# Altium PCB STLinkV2_1.PcbDoc (part 2 of 2)
Units mm, origin at the board's own origin, x right, y up, seen from the top; angles counter-clockwise.
Board outline 37 x 14 mm, 4 copper layers (Top Layer, GND, Layer 2, Bottom Layer), stack 1.587 mm thick; 49 components, 42 nets, 180 pads, 75 vias.
Unrouted connection lines stored in the file: 1.
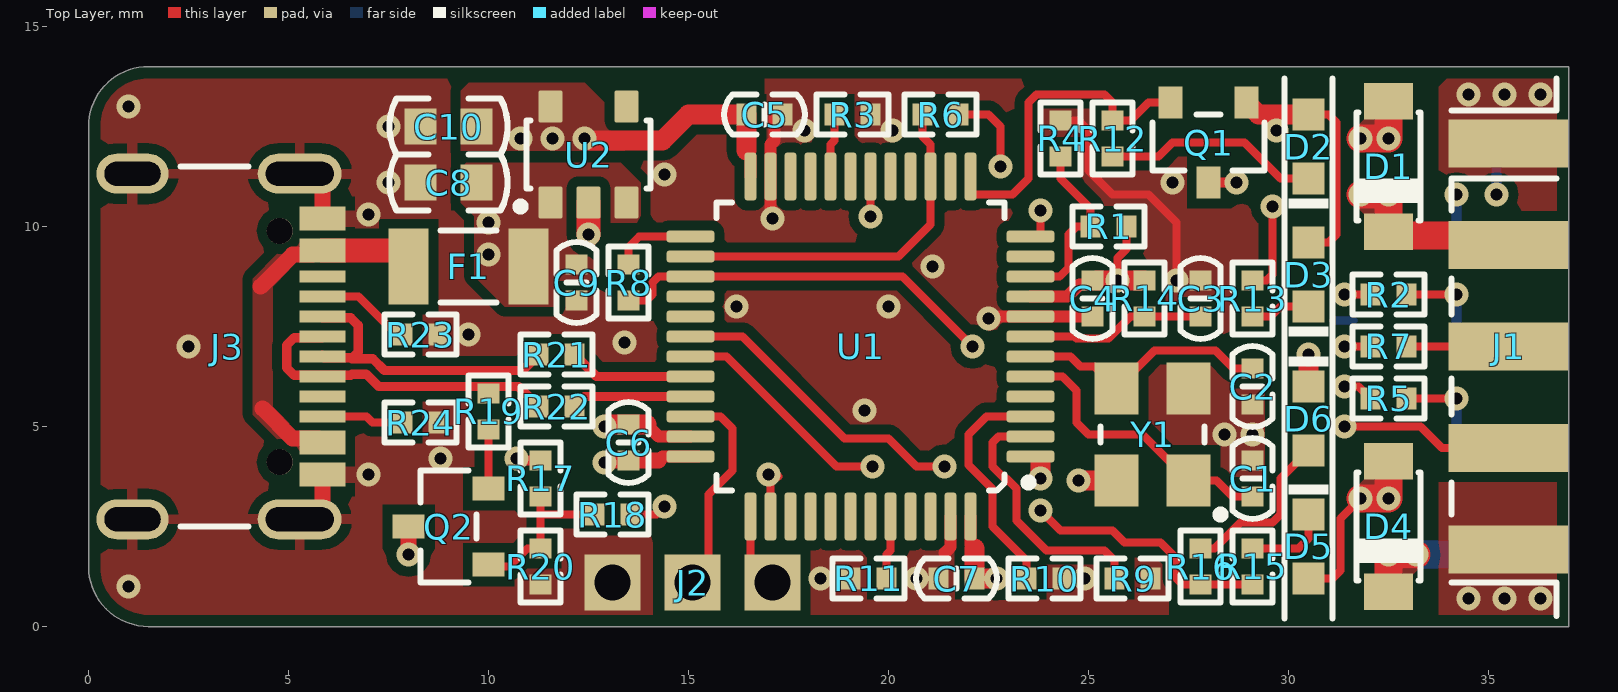
[diagram p0: Top Layer view]

## Part data (continued)
R8 R12 R13 R18: library part RES_AC0402FR-7W100RL, "Res Thick Film 0402 100 Ohm 1% 0.125W(1/8W) ±100ppm/C Pad SMD T/R Automotive AEC-Q200", Case/Package=0402, Manufacturer 1="Yageo Group", Manufacturer Part Number 1=AC0402FR-7W100RL, Max Operating Temperature=155°C, Min Operating Temperature=-55°C, Power Dissipation=125mW, Resistance=100?, Supplier Part Number 1=13-AC0402FR-7W100RLCT-ND, Temperature Coefficient=100ppm/°C, TOLERANCE=1%, Voltage Rating=50V, Working Voltage=75V, China RoHS=Non-Compliant, ComponentLink1Description=https://datasheet.octopart.com:443/AC0402FR-7W100RL-Yageo-datasheet-182189377.pdf?src-supplier=IHS, ComponentLink1URL=https://datasheet.octopart.com:443/AC0402FR-7W100RL-Yageo-datasheet-182189377.pdf?src-supplier=IHS, ComponentLink2Description=https://datasheet.octopart.com:443/AC0402FR-7W100RL-Yageo-datasheet-83209224.pdf?src-supplier=Upverter, ComponentLink2URL=https://datasheet.octopart.com:443/AC0402FR-7W100RL-Yageo-datasheet-83209224.pdf?src-supplier=Upverter, ComponentLink3Description=https://datasheet.octopart.com:443/AC0402FR-7W100RL-Yageo-datasheet-178509465.pdf?src-supplier=Newark, ComponentLink3URL=https://datasheet.octopart.com:443/AC0402FR-7W100RL-Yageo-datasheet-178509465.pdf?src-supplier=Newark, ComponentLink4Description=https://datasheet.octopart.com:443/AC0402FR-7W100RL-Yageo-datasheet-164768995.pdf?src-supplier=ODG+(Origin+Data+Global), ComponentLink4URL=https://datasheet.octopart.com:443/AC0402FR-7W100RL-Yageo-datasheet-164768995.pdf?src-supplier=ODG+(Origin+Data+Global), ComponentLink5Description=https://datasheet.octopart.com:443/AC0402FR-7W100RL-Yageo-Group-datasheet-189830439.pdf?src-supplier=Future+Electronics, ComponentLink5URL=https://datasheet.octopart.com:443/AC0402FR-7W100RL-Yageo-Group-datasheet-189830439.pdf?src-supplier=Future+Electronics, ComponentLink6Description=https://datasheet.octopart.com:443/AC0402FR-7W100RL-Yageo-datasheet-166720450.pdf?src-supplier=Future+Electronics, ComponentLink6URL=https://datasheet.octopart.com:443/AC0402FR-7W100RL-Yageo-datasheet-166720450.pdf?src-supplier=Future+Electronics, ComponentLink7Description=https://datasheet.octopart.com:443/AC0402FR-7W100RL-Yageo-Group-datasheet-159083007.pdf?src-supplier=HQonline, ComponentLink7URL=https://datasheet.octopart.com:443/AC0402FR-7W100RL-Yageo-Group-datasheet-159083007.pdf?src-supplier=HQonline, ComponentLink8Description=https://datasheet.octopart.com/AC0402FR-7W100RL-Yageo-datasheet-12512238.pdf, ComponentLink8URL=https://datasheet.octopart.com/AC0402FR-7W100RL-Yageo-datasheet-12512238.pdf, ComponentLink9Description=http://sigma.octopart.com:80/conflict_mineral_statement/Yageo-company-3.pdf?src-supplier=Compliance+Statements, ComponentLink9URL=http://sigma.octopart.com:80/conflict_mineral_statement/Yageo-company-3.pdf?src-supplier=Compliance+Statements, ComponentLink10Description=http://sigma.octopart.com:80/rohs_statement/Yageo-company-2.pdf?src-supplier=Compliance+Statements, ComponentLink10URL=http://sigma.octopart.com:80/rohs_statement/Yageo-company-2.pdf?src-supplier=Compliance+Statements, Composition="Thick Film", Country of Origin="Mainland China, Taiwan", Export Control Classification Number (ECCN) Code=EAR99, Harmonized Tariff Schedule (HTS) Code=8533.21.00.30, Height=320µm, Introduction Date=2017-06-20, Lifecycle Status=Production, Mount="Surface Mount", Number of Terminals=2, Packaging="Tape & Reel", Power Rating=125mW, Pricing 1="1=0,1, 10=0,006, 25=0,0056, 50=0,0052, 100=0,005 (USD)", REACH SVHC=Yes, RoHS=Compliant, Stock 1=97922, Supplier 1=DigiKey, Width=500µm
R9 R10 R17: library part RES_AC0402FR-7W10KL, "Res Thick Film 0402 10K Ohm 1% 0.125W(1/8W) ±100ppm/C Pad SMD Automotive T/R", Case/Package=0402, Manufacturer 1="Yageo Group", Manufacturer Part Number 1=AC0402FR-7W10KL, Max Operating Temperature=155°C, Min Operating Temperature=-55°C, Power Dissipation=125mW, Resistance=10k?, Supplier Part Number 1=13-AC0402FR-7W10KLCT-ND, Temperature Coefficient=100ppm/°C, TOLERANCE=1%, Voltage Rating=50V, Working Voltage=75V, China RoHS=Non-Compliant, ComponentLink1Description=https://datasheet.octopart.com:443/AC0402FR-7W10KL-Yageo-datasheet-182189377.pdf?src-supplier=IHS, ComponentLink1URL=https://datasheet.octopart.com:443/AC0402FR-7W10KL-Yageo-datasheet-182189377.pdf?src-supplier=IHS, ComponentLink2Description=https://datasheet.octopart.com:443/AC0402FR-7W10KL-Yageo-datasheet-83209224.pdf?src-supplier=Upverter, ComponentLink2URL=https://datasheet.octopart.com:443/AC0402FR-7W10KL-Yageo-datasheet-83209224.pdf?src-supplier=Upverter, ComponentLink3Description=https://datasheet.octopart.com:443/AC0402FR-7W10KL-Yageo-datasheet-178509465.pdf?src-supplier=Farnell, ComponentLink3URL=https://datasheet.octopart.com:443/AC0402FR-7W10KL-Yageo-datasheet-178509465.pdf?src-supplier=Farnell, ComponentLink4Description=https://datasheet.octopart.com:443/AC0402FR-7W10KL-Yageo-datasheet-151884373.pdf?src-supplier=Future+Electronics, ComponentLink4URL=https://datasheet.octopart.com:443/AC0402FR-7W10KL-Yageo-datasheet-151884373.pdf?src-supplier=Future+Electronics, ComponentLink5Description=https://datasheet.octopart.com:443/AC0402FR-7W10KL-Yageo-Group-datasheet-189830439.pdf?src-supplier=Future+Electronics, ComponentLink5URL=https://datasheet.octopart.com:443/AC0402FR-7W10KL-Yageo-Group-datasheet-189830439.pdf?src-supplier=Future+Electronics, ComponentLink6Description=https://datasheet.octopart.com:443/AC0402FR-7W10KL-Yageo-datasheet-166720450.pdf?src-supplier=Future+Electronics, ComponentLink6URL=https://datasheet.octopart.com:443/AC0402FR-7W10KL-Yageo-datasheet-166720450.pdf?src-supplier=Future+Electronics, ComponentLink7Description=https://datasheet.octopart.com:443/AC0402FR-7W10KL-Yageo-Group-datasheet-164768995.pdf?src-supplier=ODG+(Origin+Data+Global), ComponentLink7URL=https://datasheet.octopart.com:443/AC0402FR-7W10KL-Yageo-Group-datasheet-164768995.pdf?src-supplier=ODG+(Origin+Data+Global), ComponentLink8Description=https://datasheet.octopart.com:443/AC0402FR-7W10KL-Yageo-Group-datasheet-159083007.pdf?src-supplier=HQonline, ComponentLink8URL=https://datasheet.octopart.com:443/AC0402FR-7W10KL-Yageo-Group-datasheet-159083007.pdf?src-supplier=HQonline, ComponentLink9Description=https://datasheet.octopart.com/AC0402FR-7W10KL-Yageo-datasheet-12512238.pdf, ComponentLink9URL=https://datasheet.octopart.com/AC0402FR-7W10KL-Yageo-datasheet-12512238.pdf, ComponentLink10Description=http://sigma.octopart.com:80/conflict_mineral_statement/Yageo-company-3.pdf?src-supplier=Compliance+Statements, ComponentLink10URL=http://sigma.octopart.com:80/conflict_mineral_statement/Yageo-company-3.pdf?src-supplier=Compliance+Statements, ComponentLink11Description=http://sigma.octopart.com:80/rohs_statement/Yageo-company-2.pdf?src-supplier=Compliance+Statements, ComponentLink11URL=http://sigma.octopart.com:80/rohs_statement/Yageo-company-2.pdf?src-supplier=Compliance+Statements, Composition="Thick Film", Height=320µm, Lifecycle Status=Production, Mount="Surface Mount", Number of Terminals=2, Packaging="Tape & Reel", Power Rating=125mW, Pricing 1="1=0,1, 10=0,012, 25=0,0096, 50=0,0072, 100=0,0051, 250=0,005 (USD)", REACH SVHC=Yes, RoHS=Compliant, Stock 1=252005, Supplier 1=DigiKey, Width=500µm
R15 R16: library part RES_AC0402FR-7W1KL, "Res Thick Film 0402 1K Ohm 1% 0.125W(1/8W) ±100ppm/C Pad SMD Automotive T/R", Case/Package=0402, Manufacturer 1="Yageo Group", Manufacturer Part Number 1=AC0402FR-7W1KL, Max Operating Temperature=155°C, Min Operating Temperature=-55°C, Power Dissipation=125mW, Resistance=1k?, Supplier Part Number 1=13-AC0402FR-7W1KLCT-ND, Temperature Coefficient=100ppm/°C, TOLERANCE=1%, Voltage Rating=50V, Working Voltage=75V, China RoHS=Non-Compliant, ComponentLink1Description=https://datasheet.octopart.com:443/AC0402FR-7W1KL-Yageo-datasheet-182189377.pdf?src-supplier=IHS, ComponentLink1URL=https://datasheet.octopart.com:443/AC0402FR-7W1KL-Yageo-datasheet-182189377.pdf?src-supplier=IHS, ComponentLink2Description=https://datasheet.octopart.com:443/AC0402FR-7W1KL-Yageo-datasheet-83209224.pdf?src-supplier=Upverter, ComponentLink2URL=https://datasheet.octopart.com:443/AC0402FR-7W1KL-Yageo-datasheet-83209224.pdf?src-supplier=Upverter, ComponentLink3Description=https://datasheet.octopart.com:443/AC0402FR-7W1KL-Yageo-datasheet-178509465.pdf?src-supplier=Farnell, ComponentLink3URL=https://datasheet.octopart.com:443/AC0402FR-7W1KL-Yageo-datasheet-178509465.pdf?src-supplier=Farnell, ComponentLink4Description=https://datasheet.octopart.com:443/AC0402FR-7W1KL-Yageo-datasheet-166720450.pdf?src-supplier=Future+Electronics, ComponentLink4URL=https://datasheet.octopart.com:443/AC0402FR-7W1KL-Yageo-datasheet-166720450.pdf?src-supplier=Future+Electronics, ComponentLink5Description=https://datasheet.octopart.com:443/AC0402FR-7W1KL-Yageo-datasheet-151884373.pdf?src-supplier=Future+Electronics, ComponentLink5URL=https://datasheet.octopart.com:443/AC0402FR-7W1KL-Yageo-datasheet-151884373.pdf?src-supplier=Future+Electronics, ComponentLink6Description=https://datasheet.octopart.com:443/AC0402FR-7W1KL-Yageo-datasheet-137699919.pdf?src-supplier=Future+Electronics, ComponentLink6URL=https://datasheet.octopart.com:443/AC0402FR-7W1KL-Yageo-datasheet-137699919.pdf?src-supplier=Future+Electronics, ComponentLink7Description=https://datasheet.octopart.com:443/AC0402FR-7W1KL-Yageo-Group-datasheet-164768995.pdf?src-supplier=ODG+(Origin+Data+Global), ComponentLink7URL=https://datasheet.octopart.com:443/AC0402FR-7W1KL-Yageo-Group-datasheet-164768995.pdf?src-supplier=ODG+(Origin+Data+Global), ComponentLink8Description=https://datasheet.octopart.com:443/AC0402FR-7W1KL-Yageo-Group-datasheet-159083007.pdf?src-supplier=HQonline, ComponentLink8URL=https://datasheet.octopart.com:443/AC0402FR-7W1KL-Yageo-Group-datasheet-159083007.pdf?src-supplier=HQonline, ComponentLink9Description=https://datasheet.octopart.com/AC0402FR-7W1KL-Yageo-datasheet-12512238.pdf, ComponentLink9URL=https://datasheet.octopart.com/AC0402FR-7W1KL-Yageo-datasheet-12512238.pdf, ComponentLink10Description=http://sigma.octopart.com:80/conflict_mineral_statement/Yageo-company-3.pdf?src-supplier=Compliance+Statements, ComponentLink10URL=http://sigma.octopart.com:80/conflict_mineral_statement/Yageo-company-3.pdf?src-supplier=Compliance+Statements, ComponentLink11Description=http://sigma.octopart.com:80/rohs_statement/Yageo-company-2.pdf?src-supplier=Compliance+Statements, ComponentLink11URL=http://sigma.octopart.com:80/rohs_statement/Yageo-company-2.pdf?src-supplier=Compliance+Statements, Composition="Thick Film", Country of Origin="Mainland China, Taiwan", Export Control Classification Number (ECCN) Code=EAR99, Harmonized Tariff Schedule (HTS) Code=8533.21.00.30, Height=320µm, Introduction Date=2017-06-20, Lifecycle Status=Production, Mount="Surface Mount", Number of Terminals=2, Packaging="Tape & Reel", Power Rating=125mW, Pricing 1="1=0,1, 10=0,009, 25=0,0072, 50=0,0052, 100=0,005 (USD)", REACH SVHC=Yes, RoHS=Compliant, Stock 1=24249, Supplier 1=DigiKey, Width=500µm
R19: library part RES_AC0402FR-7W1K5L, "Fixed Resistor, Metal Glaze/thick Film, 0.125W, 1500ohm, 75V, 1% +/-Tol, 100ppm/Cel, Surface Mount, 0402", Case/Package=0402, Manufacturer 1="Yageo Group", Manufacturer Part Number 1=AC0402FR-7W1K5L, Max Operating Temperature=155°C, Min Operating Temperature=-55°C, Power Dissipation=125mW, Resistance=1.5k?, Supplier Part Number 1=13-AC0402FR-7W1K5LCT-ND, Temperature Coefficient=100ppm/°C, TOLERANCE=1%, Voltage Rating=50V, Working Voltage=75V, China RoHS=Non-Compliant, ComponentLink1Description=https://datasheet.octopart.com:443/AC0402FR-7W1K5L-Yageo-datasheet-182189377.pdf?src-supplier=IHS, ComponentLink1URL=https://datasheet.octopart.com:443/AC0402FR-7W1K5L-Yageo-datasheet-182189377.pdf?src-supplier=IHS, ComponentLink2Description=https://datasheet.octopart.com:443/AC0402FR-7W1K5L-Yageo-datasheet-83209224.pdf?src-supplier=Upverter, ComponentLink2URL=https://datasheet.octopart.com:443/AC0402FR-7W1K5L-Yageo-datasheet-83209224.pdf?src-supplier=Upverter, ComponentLink3Description=https://datasheet.octopart.com:443/AC0402FR-7W1K5L-Yageo-datasheet-178509465.pdf?src-supplier=Farnell, ComponentLink3URL=https://datasheet.octopart.com:443/AC0402FR-7W1K5L-Yageo-datasheet-178509465.pdf?src-supplier=Farnell, ComponentLink4Description=https://datasheet.octopart.com:443/AC0402FR-7W1K5L-Yageo-datasheet-166720450.pdf?src-supplier=Future+Electronics, ComponentLink4URL=https://datasheet.octopart.com:443/AC0402FR-7W1K5L-Yageo-datasheet-166720450.pdf?src-supplier=Future+Electronics, ComponentLink5Description=https://datasheet.octopart.com:443/AC0402FR-7W1K5L-Yageo-datasheet-151884373.pdf?src-supplier=Future+Electronics, ComponentLink5URL=https://datasheet.octopart.com:443/AC0402FR-7W1K5L-Yageo-datasheet-151884373.pdf?src-supplier=Future+Electronics, ComponentLink6Description=https://datasheet.octopart.com/AC0402FR-7W1K5L-Yageo-datasheet-12512238.pdf, ComponentLink6URL=https://datasheet.octopart.com/AC0402FR-7W1K5L-Yageo-datasheet-12512238.pdf, ComponentLink7Description=http://sigma.octopart.com:80/conflict_mineral_statement/Yageo-company-3.pdf?src-supplier=Compliance+Statements, ComponentLink7URL=http://sigma.octopart.com:80/conflict_mineral_statement/Yageo-company-3.pdf?src-supplier=Compliance+Statements, ComponentLink8Description=http://sigma.octopart.com:80/rohs_statement/Yageo-company-2.pdf?src-supplier=Compliance+Statements, ComponentLink8URL=http://sigma.octopart.com:80/rohs_statement/Yageo-company-2.pdf?src-supplier=Compliance+Statements, Composition="Thick Film", Country of Origin="Mainland China, Taiwan", Export Control Classification Number (ECCN) Code=EAR99, Harmonized Tariff Schedule (HTS) Code=8533.21.00.30, Height=320µm, Introduction Date=2017-06-20, Lifecycle Status=Production, Mount="Surface Mount", Number of Terminals=2, Packaging="Tape & Reel", Power Rating=125mW, Pricing 1="1=0,1, 10=0,006, 25=0,0056, 50=0,0052, 100=0,005 (USD)", REACH SVHC=Yes, RoHS=Compliant, Stock 1=7370, Supplier 1=DigiKey, Width=500µm
R20: library part RES_AC0402FR-7W36KL, "Chip Resistor Automotive Grade Thick Film 0402 36kOhm 1% Paper T/R", Case/Package=0402, Manufacturer 1="Yageo Group", Manufacturer Part Number 1=AC0402FR-7W36KL, Max Operating Temperature=155°C, Min Operating Temperature=-55°C, Power Dissipation=125mW, Resistance=36k?, Supplier Part Number 1=13-AC0402FR-7W36KLCT-ND, Temperature Coefficient=100ppm/°C, TOLERANCE=1%, Voltage Rating=50V, Working Voltage=75V, China RoHS=Non-Compliant, ComponentLink1Description=https://datasheet.octopart.com:443/AC0402FR-7W36KL-Yageo-datasheet-182189377.pdf?src-supplier=IHS, ComponentLink1URL=https://datasheet.octopart.com:443/AC0402FR-7W36KL-Yageo-datasheet-182189377.pdf?src-supplier=IHS, ComponentLink2Description=https://datasheet.octopart.com:443/AC0402FR-7W36KL-Yageo-datasheet-83209224.pdf?src-supplier=Upverter, ComponentLink2URL=https://datasheet.octopart.com:443/AC0402FR-7W36KL-Yageo-datasheet-83209224.pdf?src-supplier=Upverter, ComponentLink3Description=https://datasheet.octopart.com:443/AC0402FR-7W36KL-Yageo-datasheet-178509465.pdf?src-supplier=Farnell, ComponentLink3URL=https://datasheet.octopart.com:443/AC0402FR-7W36KL-Yageo-datasheet-178509465.pdf?src-supplier=Farnell, ComponentLink4Description=https://datasheet.octopart.com:443/AC0402FR-7W36KL-Yageo-datasheet-166720450.pdf?src-supplier=Future+Electronics, ComponentLink4URL=https://datasheet.octopart.com:443/AC0402FR-7W36KL-Yageo-datasheet-166720450.pdf?src-supplier=Future+Electronics, ComponentLink5Description=https://datasheet.octopart.com:443/AC0402FR-7W36KL-Yageo-datasheet-151884373.pdf?src-supplier=Future+Electronics, ComponentLink5URL=https://datasheet.octopart.com:443/AC0402FR-7W36KL-Yageo-datasheet-151884373.pdf?src-supplier=Future+Electronics, ComponentLink6Description=https://datasheet.octopart.com/AC0402FR-7W36KL-Yageo-datasheet-12512238.pdf, ComponentLink6URL=https://datasheet.octopart.com/AC0402FR-7W36KL-Yageo-datasheet-12512238.pdf, ComponentLink7Description=http://sigma.octopart.com:80/conflict_mineral_statement/Yageo-company-3.pdf?src-supplier=Compliance+Statements, ComponentLink7URL=http://sigma.octopart.com:80/conflict_mineral_statement/Yageo-company-3.pdf?src-supplier=Compliance+Statements, ComponentLink8Description=http://sigma.octopart.com:80/rohs_statement/Yageo-company-2.pdf?src-supplier=Compliance+Statements, ComponentLink8URL=http://sigma.octopart.com:80/rohs_statement/Yageo-company-2.pdf?src-supplier=Compliance+Statements, Composition="Thick Film", Height=320µm, Lifecycle Status=Production, Mount="Surface Mount", Number of Terminals=2, Packaging="Tape & Reel", Power Rating=125mW, Pricing 1="1=0,1, 10=0,008, 25=0,0068, 50=0,0052, 100=0,005 (USD)", REACH SVHC=Yes, RoHS=Compliant, Stock 1=7740, Supplier 1=DigiKey, Width=500µm
R21 R22: library part RES_AC0402FR-7W10RL, "Res Thick Film 0402 10 Ohm 1% 0.125W(1/8W) ±100ppm/C Pad SMD T/R Automotive AEC-Q200", Case/Package=0402, Manufacturer 1="Yageo Group", Manufacturer Part Number 1=AC0402FR-7W10RL, Max Operating Temperature=155°C, Min Operating Temperature=-55°C, Power Dissipation=125mW, Resistance=10?, Supplier Part Number 1=13-AC0402FR-7W10RLCT-ND, Temperature Coefficient=100ppm/°C, TOLERANCE=1%, Voltage Rating=50V, Working Voltage=75V, China RoHS=Non-Compliant, ComponentLink1Description=https://datasheet.octopart.com:443/AC0402FR-7W10RL-Yageo-datasheet-182189377.pdf?src-supplier=IHS, ComponentLink1URL=https://datasheet.octopart.com:443/AC0402FR-7W10RL-Yageo-datasheet-182189377.pdf?src-supplier=IHS, ComponentLink2Description=https://datasheet.octopart.com:443/AC0402FR-7W10RL-Yageo-datasheet-83209224.pdf?src-supplier=Upverter, ComponentLink2URL=https://datasheet.octopart.com:443/AC0402FR-7W10RL-Yageo-datasheet-83209224.pdf?src-supplier=Upverter, ComponentLink3Description=https://datasheet.octopart.com:443/AC0402FR-7W10RL-Yageo-datasheet-178509465.pdf?src-supplier=Farnell, ComponentLink3URL=https://datasheet.octopart.com:443/AC0402FR-7W10RL-Yageo-datasheet-178509465.pdf?src-supplier=Farnell, ComponentLink4Description=https://datasheet.octopart.com:443/AC0402FR-7W10RL-Yageo-Group-datasheet-164768995.pdf?src-supplier=ODG+(Origin+Data+Global), ComponentLink4URL=https://datasheet.octopart.com:443/AC0402FR-7W10RL-Yageo-Group-datasheet-164768995.pdf?src-supplier=ODG+(Origin+Data+Global), ComponentLink5Description=https://datasheet.octopart.com/AC0402FR-7W10RL-Yageo-datasheet-12512238.pdf, ComponentLink5URL=https://datasheet.octopart.com/AC0402FR-7W10RL-Yageo-datasheet-12512238.pdf, ComponentLink6Description=http://sigma.octopart.com:80/conflict_mineral_statement/Yageo-company-3.pdf?src-supplier=Compliance+Statements, ComponentLink6URL=http://sigma.octopart.com:80/conflict_mineral_statement/Yageo-company-3.pdf?src-supplier=Compliance+Statements, ComponentLink7Description=http://sigma.octopart.com:80/rohs_statement/Yageo-company-2.pdf?src-supplier=Compliance+Statements, ComponentLink7URL=http://sigma.octopart.com:80/rohs_statement/Yageo-company-2.pdf?src-supplier=Compliance+Statements, Composition="Thick Film", Country of Origin="Mainland China, Taiwan", Export Control Classification Number (ECCN) Code=EAR99, Harmonized Tariff Schedule (HTS) Code=8533.21.00.30, Height=320µm, Introduction Date=2017-06-20, Lifecycle Status=Production, Mount="Surface Mount", Number of Terminals=2, Packaging="Tape & Reel", Power Rating=125mW, Pricing 1="1=0,1, 10=0,009, 25=0,008, 50=0,0072, 100=0,0068 (USD)", REACH SVHC=Yes, RoHS=Compliant, Stock 1=159700, Supplier 1=DigiKey, Width=500µm
U1: "MCU 32-bit STM32F1 ARM Cortex M3 RISC 128KB Flash 2.5V/3.3V 48-Pin LQFP T/R", Ambient Temperature Range High=105°C, Case/Package=LQFP, Frequency=72MHz, Manufacturer 1=STMicroelectronics, Max Frequency=1.25MHz, Max Operating Temperature=85°C, Max Power Dissipation=363mW, Max Supply Current=50mA, Max Supply Voltage=3.6V, Min Operating Temperature=-40°C, Min Supply Voltage=2V, Nominal Supply Current=1.7µA, Operating Supply Voltage=3.3V, Supplier Part Number 1=497-17380-1-ND, ADC Channels (Resolution)="10-Ch 12-Bit", China RoHS=Compliant, ComponentLink1Description=https://datasheet.octopart.com:443/STM32F103CBT6TR-STMicroelectronics-datasheet-177520228.pdf?src-supplier=IHS, ComponentLink1URL=https://datasheet.octopart.com:443/STM32F103CBT6TR-STMicroelectronics-datasheet-177520228.pdf?src-supplier=IHS, ComponentLink2Description=https://datasheet.octopart.com:443/STM32F103CBT6TR-STMicroelectronics-datasheet-14363502.pdf?src-supplier=Upverter, ComponentLink2URL=https://datasheet.octopart.com:443/STM32F103CBT6TR-STMicroelectronics-datasheet-14363502.pdf?src-supplier=Upverter, ComponentLink3Description=https://datasheet.octopart.com:443/STM32F103CBT6TR-STMicroelectronics-datasheet-48026265.pdf?src-supplier=SHENGYU+ELECTRONICS, ComponentLink3URL=https://datasheet.octopart.com:443/STM32F103CBT6TR-STMicroelectronics-datasheet-48026265.pdf?src-supplier=SHENGYU+ELECTRONICS, ComponentLink4Description=https://datasheet.octopart.com:443/STM32F103CBT6TR-STMicroelectronics-datasheet-10330614.pdf?src-supplier=Future+Electronics, ComponentLink4URL=https://datasheet.octopart.com:443/STM32F103CBT6TR-STMicroelectronics-datasheet-10330614.pdf?src-supplier=Future+Electronics, ComponentLink5Description=https://datasheet.octopart.com:443/STM32F103CBT6TR-STMicroelectronics-datasheet-134581200.pdf?src-supplier=Future+Electronics, ComponentLink5URL=https://datasheet.octopart.com:443/STM32F103CBT6TR-STMicroelectronics-datasheet-134581200.pdf?src-supplier=Future+Electronics, ComponentLink6Description=https://datasheet.octopart.com:443/STM32F103CBT6TR-STMicroelectronics-datasheet-500013.pdf?src-supplier=STMicroelectronics, ComponentLink6URL=https://datasheet.octopart.com:443/STM32F103CBT6TR-STMicroelectronics-datasheet-500013.pdf?src-supplier=STMicroelectronics, ComponentLink7Description=https://datasheet.octopart.com:443/STM32F103CBT6TR-STMicroelectronics-datasheet-14106722.pdf?src-supplier=iiiC, ComponentLink7URL=https://datasheet.octopart.com:443/STM32F103CBT6TR-STMicroelectronics-datasheet-14106722.pdf?src-supplier=iiiC, ComponentLink8Description=https://datasheet.octopart.com:443/STM32F103CBT6TR-STMicroelectronics-datasheet-17594274.pdf?src-supplier=TME, ComponentLink8URL=https://datasheet.octopart.com:443/STM32F103CBT6TR-STMicroelectronics-datasheet-17594274.pdf?src-supplier=TME, Core Architecture=ARM, Data Bus Width=32b, EEPROM Memory Size=0B, Flash Memory Size=128kB, Height=1.6mm, Height - Seated (Max)=1.6mm, Interface="CAN, IrDA, LIN, USB", Lead Free="Lead Free", Length=7mm, Lifecycle Status=Production, Manufacturer Part Number 1=STM32F103CBT6TR, Max Junction Temperature (Tj)=105°C, Memory Size=128kB, Memory Type=FLASH, Number of A/D Converters=2, Number of ADC Channels=10, Number of Channels=10, Number of I2C Channels=2, Number of I/Os=37, Number of Pins=48, Number of Programmable I/O=37, Number of PWM Channels=4, Number of SPI Channels=2, Number of Terminals=48, Number of Timers/Counters=4, Number of UART Channels=3, Number of USART Channels=3, Number of USB Channels=1, Oscillator Type=Internal, Packaging="Tape and Reel", Peripherals=POR, Pricing 1="1=6,9, 10=5,316, 25=4,92, 100=4,4847, 250=4,2772, 500=4,1521, 1000=4,04916 (USD)", Radiation Hardening=No, RAM Size=20kB, REACH SVHC=Yes, RoHS=Compliant, Schedule B="8542310000, 8542310000|8542310000|8542310000|8542310000|8542310000", Stock 1=18093, Supplier 1=DigiKey, Terminal Pitch=500µm, Watchdog Timer=Yes, Width=7mm
U2: "AP2112 Series 0.6 A 3.3 V Fixed Output SMT LDO Linear Regulator - SOT23-5", Ambient Temperature Range High=85°C, Case/Package=SOT-23-5, Dropout Voltage=250mV, Manufacturer 1="Diodes Inc.", Max Input Voltage=6V, Max Output Current=600mA, Min Input Voltage=2.5V, Min Operating Temperature=-40°C, Nominal Supply Current=55µA, Output Voltage=3.3V, Supplier Part Number 1=AP2112K-3.3TRG1DICT-ND, Voltage Tolerance=1.5%, Accuracy=1.5%, China RoHS=Compliant, ComponentLink1Description=https://datasheet.octopart.com:443/AP2112K-3.3TRG1-Diodes-Inc.-datasheet-101745658.pdf?src-supplier=IHS, ComponentLink1URL=https://datasheet.octopart.com:443/AP2112K-3.3TRG1-Diodes-Inc.-datasheet-101745658.pdf?src-supplier=IHS, ComponentLink2Description=https://datasheet.octopart.com:443/AP2112K-3.3TRG1-Diodes-Inc.-datasheet-182385097.pdf?src-supplier=IHS, ComponentLink2URL=https://datasheet.octopart.com:443/AP2112K-3.3TRG1-Diodes-Inc.-datasheet-182385097.pdf?src-supplier=IHS, ComponentLink3Description=https://datasheet.octopart.com:443/AP2112K-3.3TRG1-Diodes-Inc.-datasheet-37177583.pdf?src-supplier=SHENGYU+ELECTRONICS, ComponentLink3URL=https://datasheet.octopart.com:443/AP2112K-3.3TRG1-Diodes-Inc.-datasheet-37177583.pdf?src-supplier=SHENGYU+ELECTRONICS, ComponentLink4Description=https://sigma.octopart.com:443/138895853/technical_drawing/Diodes-Inc.-AP2112K-3.3TRG1.pdf?src-supplier=Upverter, ComponentLink4URL=https://sigma.octopart.com:443/138895853/technical_drawing/Diodes-Inc.-AP2112K-3.3TRG1.pdf?src-supplier=Upverter, Height=1.4mm, Height - Seated (Max)=1.45mm, Lead Free="Lead Free", Length=2.92mm, Lifecycle Status=Production, Manufacturer Part Number 1=AP2112K-3.3TRG1, Max Junction Temperature (Tj)=85°C, Max Operating Temperature=85°C, Max Supply Voltage=6V, Min Supply Voltage=2.5V, Mount="Surface Mount", Number of Channels=1, Number of Circuits=1, Number of Outputs=1, Number of Pins=5, Number of Regulators=1, Number of Terminals=5, Output Current=600mA, Output Type=Fixed, Packaging=Digi-Reel®, Polarity=Positive, Pricing 1="1=0,22, 10=0,153, 25=0,1348, 100=0,1151, 250=0,10576, 500=0,1001, 1000=0,09545 (USD)", Quiescent Current=55µA, REACH SVHC=Yes, RoHS=Compliant, Schedule B="8542390000, 8542390000|8542390000|8542390000|8542390000|8542390000", Stock 1=32841, Supplier 1=DigiKey, Terminal Pitch=950µm, Width=1.6mm
Y1: library part Y_ECS-80-10-33-CKM-TR3, "CRYSTAL 8.0000MHZ 10PF SMD", Case/Package="4-SMD (3.2x2.5)", Manufacturer 1="ECS International", Supplier Part Number 1=50-ECS-80-10-33-CKM-TR3CT-ND, ComponentLink1Description=https://datasheet.octopart.com/ECS-80-10-33-CKM-TR3-ECS-International-datasheet-140089731.pdf?src-supplier=Master+Electronics, ComponentLink1URL=https://datasheet.octopart.com/ECS-80-10-33-CKM-TR3-ECS-International-datasheet-140089731.pdf?src-supplier=Master+Electronics, Manufacturer Part Number 1=ECS-80-10-33-CKM-TR3, MFG="ECS Inc.", MFG PART NUMBER=ECS-80-10-33-CKM-TR3, PART DESCRIPTION="8 MHz ±10ppm Crystal 10pF 400 Ohms 4-SMD, No Lead", PART SUPPLIER LINK 1=https://www.digikey.com/en/products/detail/ecs-inc/ECS-80-10-33-CKM-TR3/15997137, PART TYPE=Crystals, Pricing 1="1=0,61, 10=0,532, 50=0,4824, 100=0,4625, 500=0,41928, 1000=0,40194 (USD)", RoHS=No, Stock 1=2920, Supplier 1=Digikey

## Free pads (board coordinates)
  rect 1.3x0.3 smd far side: 2(32.15,2.75) 2(32.15,11.25) 2(32.15,11.75) 2(32.15,2.25)

## Via types
v1: diameter 0.6, hole 0.3, Top Layer to Bottom Layer, tented both sides, 75 vias

## Nets (pads, with @x,y where several pads share a name; then routed paths per layer and width w, separated by ;. In a path a pad name is that pad's centre, name@x,y a point inside that pad or via, vN(x,y) a via of type N, cw(c..) or ccw(c..) an arc to the next point about the centre after c; other vN are vias at no path point)
+3V3: C4.1 C5.1 C6.1 C7.1 C10.2 D2.1 D3.1 D4.1 D5.1 pad.2@32.15,2.75 Q1.1 Q2.3 R1.2 R14.2 U1.1 U1.9 U1.24 U1.36 U1.48 U2.5 | length 28.8
  Top Layer w0.2: U1.1 23.65,4.25 U1.1@23.8,4.1 ; v1(25.725,8.65) 25.725,9.211 25.95,9.436 R1.2 ; D5.1 31.1,1.2 31.3,1.4 31.3,2.7 v1(31.8,3.2) ; D3.1 31,9.6 31.2,9.8 31.2,12.6 31,12.8 D2.1
  Top Layer w0.3: 14.25,4.15 14.35,4.25 U1.36 U1.36@15.25,4.25 ; 16.4,11.9 16.55,11.75 U1.24 ; U1.48 22.05,2.05 22.15,1.95 ; U1.9 24.475,8.25 24.775,8.55 25.1,8.55 C4.1@25.2,8.65
  Top Layer w0.4: v1(8,1.8) Q2.3 ; v1(12.9,4.1) 12.95,4.15 C6.1 ; C6.1@13.45,4.2 C6.1 ; 14.25,4.15 C6.1
  Top Layer w0.5: v1(12.4,12.2) 12.45,12.15 14.35,12.15 15,12.8 C5.1 16.45,11.9 ; 22.15,1.95 C7.1 v1(22.7,1.2) ; v1(23.8,3.7) U1.1@23.8,4.1 ; C4.1@25.2,8.65 v1(25.725,8.65) R14.2 ; Q1.1 29.25,12.8 D2.1
  Top Layer w0.7: v1(31.8,3.2) v1(32.5,3.2) D4.1
  Layer 2 w0.3: 31.2,11.45 33,11.45
  other v1: 10.8,12.2 11.6,12.2 29.7,12.4
+3V3_PIN: D4.2 J1.10 pad.2@32.15,2.25 | length 4.7
  Top Layer w0.7: D4.2 v1(32.5,1.8) v1(33.2,1.8)
  Bottom Layer w0.7: v1(32.5,1.8) v1(33.2,1.8) 35.38,1.8 J1.10
+5V: C8.2 C9.1 D1.1 F1.2 pad.2@32.15,11.75 R17.1 U2.1 U2.3 | length 34.5
  Top Layer w0.254: v1(10.7,4.2) 10.75,4.15 R17.1
  Top Layer w0.7: v1(31.8,12.2) v1(32.5,12.2) D1.1
  Layer 2 w0.254: v1(10,9.3) 10.7,8.6 v1(10.7,4.2)
  Layer 2 w0.8: v1(10,9.3) v1(10,10.1) 9.8,10.3 9.8,12.6 10.5,13.3 30.7,13.3 v1(31.8,12.2) v1(32.5,12.2)
+5V_PIN: D1.2 J1.3 pad.2@32.15,11.25 | length 4.7
  Top Layer w0.7: v1(31.8,10.8) v1(32.5,10.8) D1.2 ; D1.2@32.5,9.775 35.265,9.775 J1.3
AIN_1: R1.1 R4.1 U1.10 | length 4.6
  Top Layer w0.2: U1.10 24.28,8.75 24.5,8.97 24.5,9.8 24.7,10 R1.1 25.05,10.45 24.3,11.2 R4.1
GND: C1.1 C2.1 C3.2 C4.2 C5.2 C6.2 C7.2 C8.1 C9.2 C10.1 D6.2 J1.1 J1.9 J2.1 J3.A1B12 J3.B1A12 J3.SH1 J3.SH2 J3.SH3 J3.SH4 R3.1 R4.2 R9.2 R10.2 R11.2 R20.2 R23.2 R24.2 U1.8 U1.23 U1.35 U1.47 U2.2 Y1.2 Y1.4 | length 20.9
  Top Layer w0.2: R4.2 24.75,12.65 25,12.4 25,11.4 25.6,10.8 26.5,10.8 27.2,10.1 v1(27.2,8.65)
  Top Layer w0.3: J3.SH4 J3.SH4@5.845,2.68 ; 13.95,5.05 14.25,4.75 U1.35 ; v1@17.05,10.25 U1.23 17.05,12.05 17.15,12.15 C5.2@17.15,12.8 ; 21.401,1.834 21.55,1.984 U1.47 ; v1(22.5,7.7) 22.55,7.75 U1.8 C4.2@25.2,7.75
  Top Layer w0.4: J3.SH4@5.845,2.68 J3.B1A12 ; J3.A1B12 J3.SH3@5.845,11.32
  Top Layer w0.5: v1(12.9,5) 12.95,5.05 C6.2 13.95,5.05 ; v1(24.75,3.65) Y1.4 ; D6.2 v1(30.5,6.8)
  Top Layer w0.6: v1(12.5,9.8) U2.2
  GND w0.2: 31.125,7.65 31.625,7.65
  Bottom Layer w0.2: 31.125,7.65 31.625,7.65
  other v1: 34.5,0.7 35.4,0.7 36.3,0.7 1,1 18.3,1.2 20.7,1.2 24.9,1.2 7,3.8 8.8,4.2 28.4,4.8 29.1,4.8 19.4,5.4 2.5,7 13.4,7.1 9.5,7.3 16.2,8 20,8 21.1,9 17.1,10.2 7,10.3 7.5,11.1 27.1,11.1 14.4,11.3 17.9,12.4 20.1,12.4 7.5,12.5 1,13 34.5,13.3 35.4,13.3 36.3,13.3
J_N: J3.A7 J3.B7 R21.2 | length 7.7
  Top Layer w0.236: J3.A7@5.845,6.782 J3.A7 5.877,6.718 6.552,6.718 6.577,6.693 ; J3.B7 5.845,7.718 6.552,7.718 6.738,7.532 6.738,6.854 6.577,6.693 ; R21.2 10.85,6.4 7.4,6.4 7.107,6.693 6.577,6.693
J_P: J3.A6 J3.B6 R19.2 R22.2 | length 8.6
  Top Layer w0.236: J3.A6 5.845,7.218 5.138,7.218 4.952,7.032 4.952,6.468 5.138,6.282 5.845,6.282 J3.B6 5.877,6.282 6.552,6.282 6.577,6.307 6.947,6.307 7.254,6 R19.2@10,6 ; R19.2@10,5.75 R19.2@10,6 ; R22.2 10.75,6 R19.2@10,6
LED_STLINK: R15.2 R16.2 U1.30 | length 16.9
  Top Layer w0.2: U1.30 16.35,7.25 18.9,4.7 20,4.7 20.7,4 v1(21.4,4) ; v1(23.8,2.9) 24.3,2.4 25.6,2.4 25.9,2.1 26.8,2.1 27.2,1.7 27.2,1.2 27.35,1.05 R16.2 R15.2
  Layer 2 w0.2: v1(21.4,4) 22.5,2.9 v1(23.8,2.9)
NetC3_1: C3.1 R14.1 U1.7 | length 4.5
  Top Layer w0.2: U1.7 24.65,7.25 24.7,7.2 25.5,7.2 26.05,7.75 R14.1 C3.1
NetD2_2: D2.2 R12.1 | length 5.4
  Top Layer w0.2: R12.1 26.75,11.75 27.1,12.1 28.9,12.1 29.8,11.2 D2.2
NetD3_2: D3.2 R13.1 | length 1.5
  Top Layer w0.2: R13.1 29.55,7.75 29.8,8 D3.2
NetD5_2: D5.2 R15.1 | length 2.1
  Top Layer w0.2: R15.1 30.25,1.95 30.5,2.2 D5.2
NetD6_1: D6.1 R16.1 | length 4.2
  Top Layer w0.2: R16.1 28.151,1.95 28.801,2.6 29.6,2.6 29.8,2.8 29.8,3.7 D6.1
NetJ3_A5: J3.A5 R23.1 | length 2.4
  Top Layer w0.2: J3.A5 6.75,8.25 7.7,7.3 R23.1
NetJ3_B5: J3.B5 R24.1 | length 2.1
  Top Layer w0.2: J3.B5 6.95,5.25 7.1,5.1 R24.1
NetQ2_1: Q2.1 R17.2 R18.1 R20.1 | length 4.1
  Top Layer w0.2: Q2.1@10,1.5 10.519,1.5 10.969,1.95 R20.1@11.25,1.95 ; R20.1 11.3,2.8 ; R17.2 11.3,2.8 ; R18.1 11.3,2.8
NetQ2_2: Q2.2 R19.1 | length 1.4
  Top Layer w0.2: Q2.2 R19.1@10,4.85
NetR3_2: R3.2 U1.20 | length 1.6
  Top Layer w0.2: U1.20 18.55,12.05 18.65,12.15 R3.2
NetR9_1: R9.1 U1.2 | length 6.6
  Top Layer w0.2: U1.2 22.75,4.75 22.6,4.6 22.6,4 22.9,3.7 22.951,3.7 23.2,3.451 23.2,2.651 23.951,1.9 25.4,1.9 25.65,1.65 R9.1
NetR10_1: R10.1 U1.3 | length 5.9
  Top Layer w0.2: R10.1 23.45,1.65 22.6,2.5 22.6,3.438 22,4.038 22,4.8 22.45,5.25 U1.3
NetR11_1: R11.1 U1.44 | length 1.6
  Top Layer w0.2: R11.1 19.95,1.8 20.05,1.9 U1.44
OSC_IN: C1.2 U1.5 Y1.1 | length 7.3
  Top Layer w0.2: U1.5 24.35,6.25 24.7,5.9 24.7,5.1 25,4.8 26.35,4.8 Y1.1 28.2,3.65 28.6,3.25 C1.2
OSC_OUT: C2.2 U1.6 Y1.3 | length 6.5
  Top Layer w0.2: U1.6 24.55,6.75 24.8,6.5 25.15,6.5 Y1.3 26.65,6.9 28.174,6.9 28.624,6.45 C2.2
RST_PIN: J1.6 R2.1 | length 2.2
  Top Layer w0.2: R2.1 v1(34.2,8.3)
  Bottom Layer w0.254: J1.6@34.2,7.34 v1(34.2,8.3)
RX_PIN: J1.2 Q1.3 | length 10.5
  Top Layer w0.254: Q1.3 v1(28.7,11.1)
  Layer 2 w0.2: v1(28.7,11.1) 29.1,11.5 29.9,11.5 31.3,10.1 32.9,10.1 33.3,10.5 33.3,11 33.8,11.5 34.5,11.5 v1(35.2,10.8)
  Bottom Layer w0.254: v1(35.2,10.8) 35.2,11.78 J1.2
STLINK_RX: Q1.2 R12.2 U1.13 | length 8.3
  Top Layer w0.2: U1.13 22.05,10.8 23.1,10.8 23.5,11.2 23.5,13.1 23.7,13.3 25.4,13.3 25.6,13.1 R12.2 26.05,12.65 26.5,13.1 Q1.2
STLINK_TX: J1.4 R13.2 U1.12 | length 15.8
  Top Layer w0.2: U1.12 23.8,9.75 v1(23.8,10.4) ; R13.2 29.45,8.65 29.6,8.8 v1(29.6,10.5)
  Layer 2 w0.2: v1(23.8,10.4) 29.4,10.4 29.45,10.35 v1(29.6,10.5) 30.6,9.5 33.5,9.5 34.2,10.2 v1(34.2,10.8)
  Bottom Layer w0.254: J1.4@34.2,9.88 v1@34.2,10.78
STM_JTCK: J2.3 U1.37 | length 1.7
  Top Layer w0.2: U1.37 16.55,1.25 J2.3@16.7,1.1
STM_JTMS: J2.2 U1.34 | length 5.3
  Top Layer w0.2: J2.2@14.9,1.1 15.5,1.7 15.5,3.3 16.1,3.9 16.1,4.95 15.8,5.25 U1.34@15.25,5.25
SWCLK_PIN: J1.7 R6.1 | length 22.1
  Top Layer w0.2: R6.1 22.5,12.8 22.8,12.5 v1(22.8,11.5) ; v1(31.4,5) 33.3,5 33.84,4.46 J1.7
  Layer 2 w0.2: v1(22.8,11.5) 22.8,10.4 23.4,9.8 28.6,9.8 29.5,8.9 31.9,8.9 32.4,8.4 32.4,5.567 31.833,5 v1(31.4,5)
SWDIO_PIN: J1.5 R7.1 | length 2.6
  Top Layer w0.2: R7.1 J1.5
SWO_PIN: J1.8 R5.1 | length 3.6
  Top Layer w0.2: R5.1 v1(34.2,5.7)
  Bottom Layer w0.254: v1(34.2,5.7) 34.2,4.8 35.16,4.8 J1.8
T_JTCK: R6.2 U1.15 U1.26 | length 9.2
  Top Layer w0.2: U1.26 20.25,9.25 21.05,10.05 U1.15 21.05,12.05 20.85,12.25 R6.2
T_JTMS: R7.2 R8.2 U1.27 | length 20.3
  Top Layer w0.2: R8.2 13.95,8.15 14.1,8.3 14.1,8.6 14.25,8.75 U1.27 20.35,8.75 v1(22.1,7) ; v1(31.4,7) 31.4,7.15 31.55,7 R7.2
  Layer 2 w0.2: v1(22.1,7) 23.3,7 23.8,7.5 30.9,7.5 v1(31.4,7)
T_NRST: R2.2 U1.18 | length 14.6
  Top Layer w0.2: v1(19.55,10.25) U1.18 ; v1(31.4,8.3) R2.2 R2.2@32.194,8.3
  Layer 2 w0.2: v1(19.55,10.25) 21.75,10.25 22.7,9.3 27.6,9.3 28.7,8.2 v1@31.544,8.2
T_SWDIO_IN: R8.1 U1.25 | length 2.3
  Top Layer w0.2: R8.1 13.5,9.483 13.767,9.75 U1.25 U1.25@15.25,9.75
T_SWO: R5.2 U1.31 | length 19.4
  Top Layer w0.2: U1.31 15.95,6.75 18.7,4 v1(19.6,4) ; v1(31.4,6) 31.75,6 R5.2
  Layer 2 w0.2: v1(19.6,4) 19.6,4.5 21.1,6 v1(31.4,6)
USB_N: R21.1 U1.32 | length 3.1
  Top Layer w0.236: R21.1 12.7,6.25 U1.32
USB_P: R22.1 U1.33 | length 3
  Top Layer w0.236: R22.1 12.4,5.75 U1.33
USB_RENUMn: R18.2 U1.38 | length 5.3
  Top Layer w0.2: R18.2 14.2,2.8 v1(14.4,3) 14.383,3 v1@14.3,2.917 ; U1.38 17.05,3.75 v1(17,3.8) 17.2,3.8 v1@17.25,3.75
  Layer 2 w0.254: v1(14.4,3) 15.2,3.8 v1(17,3.8)
VBUS: F1.1 J3.A4B9 J3.B4A9 | length 5.8
  Top Layer w0.4: 4.302,8.498 5.104,9.3 J3.A4B9@5.6,9.3 ; 4.352,5.452 5.104,4.7 5.745,4.7 J3.B4A9 ; F1.1@7.6,9.4 F1.1
  Top Layer w0.6: J3.A4B9 F1.1@7.6,9.4
pads on no net: J3.0 J3.A8 J3.B8 U1.4 U1.11 U1.14 U1.16 U1.17 U1.19 U1.21 U1.22 U1.28 U1.29 U1.39 U1.40 U1.41 U1.42 U1.43 U1.45 U1.46 U2.4

## Polygon pours and split planes (outlines as drawn)
GND on Top Layer "Top Layer-GND 2" (solid, remove dead copper, pour order 22): 0.3,1.5 0.3,12.5 cw(c1.5,12.5) 1.5,13.7 36.7,13.7 36.7,0.3 1.5,0.3 cw(c1.5,1.5)
+3V3_PIN on Top Layer "Top Layer-+5V 1" (solid, pour order 0): 33.1,0.5 33.1,1.3 33.4,1.6 33.4,1.9 33.2,2.1 32.4,2.1 32.2,1.9 32.2,0.5
+3V3 on Top Layer "Top Layer-+5V 1" (solid, pour order 4): 31.9,4.5 31.9,3.7 31.6,3.4 31.6,3.1 31.8,2.9 32.6,2.9 32.8,3.1 32.8,4.5
+5V_PIN on Top Layer "Top Layer-+5V 1" (solid, remove dead copper, pour order 2): 31.9,9.5 31.9,10.3 31.6,10.6 31.6,10.9 31.8,11.1 32.6,11.1 32.8,10.9 32.8,9.5
+5V on Top Layer "Top Layer-+5V 1" (solid, pour order 6): 31.9,13.5 31.9,12.7 31.6,12.4 31.6,12.1 31.8,11.9 32.6,11.9 32.8,12.1 32.8,13.5
+5V on Top Layer "Top Layer-+5V" (solid, remove dead copper, pour order 8): 9.3,11.6 9.3,10.6 9.4,10.5 9.64,10.26 9.64,8.76 10.4,8 11.725,8 11.725,8.6 12.675,8.6 12.675,9.5 12.2,9.5 12.2,11.086 12.945,11.086 12.945,10.1 13.7,10.1 13.8,10.1 13.8,11.1 13.3,11.6
+3V3 on Top Layer "Top Layer-+3V3" (solid, remove dead copper, pour order 12): 9.3,13.4 9.3,11.9 13.4,11.9 13.4,12.6 12.4,13.6 9.5,13.6
no net on Top Layer "Top Layer-No Net" (solid, pour order 20): 0,0
VBUS on Top Layer "VBUS_L01_P000" (solid, pour order 14): 6.4,9.7 5.1,9.7 4.1,8.7 4.1,5.3 5.1,4.3 6.4,4.3 6.4,4.9 5.2,4.9 4.6,5.5 4.6,8.5 5.2,9.1 6.4,9.1
GND on GND "GND-GND" (solid, remove dead copper, pour order 24): 0.3,1.5 0.3,12.5 cw(c1.5,12.5) 1.5,13.7 36.7,13.7 36.7,0.3 1.5,0.3 cw(c1.5,1.5)
+3V3 on Layer 2 "Layer 2-GND" (solid, remove dead copper, pour order 34): 0.3,1.5 0.3,12.5 cw(c1.5,12.5) 1.5,13.7 36.7,13.7 36.7,0.3 1.501,0.3 cw(c1.5,1.5)
+3V3_PIN on Bottom Layer "+3V3_PIN_L04_P026" (solid, remove dead copper, pour order 26): 32.8,2.25 32.8,1.8 32.45,1.45 31.925,1.45 cw(c31.925,1.875) 31.5,1.875 31.5,2.25
GND on Bottom Layer "Bottom Layer-GND" (solid, remove dead copper, pour order 36): 0.3,1.5 0.3,12.5 cw(c1.5,12.5) 1.5,13.7 36.7,13.7 36.7,0.3 1.5,0.3 cw(c1.5,1.5)
+3V3 on Bottom Layer "Bottom Layer-+3V3" (solid, remove dead copper, pour order 28): 31.5,2.75 31.5,3.2 31.8,3.5 32.5,3.5 32.8,3.2 32.8,2.75
+5V_PIN on Bottom Layer "Bottom Layer-+5V" (solid, remove dead copper, pour order 30): 32.8,11.25 32.8,10.8 32.5,10.5 31.8,10.5 31.5,10.8 31.5,11.25
+5V on Bottom Layer "Bottom Layer-+5V" (solid, remove dead copper, pour order 32): 31.5,11.75 31.5,12.2 31.8,12.5 32.5,12.5 32.8,12.2 32.8,11.75

## Other copper
Top Layer:
  pour cut-out: 27,0 27,0.9 27.1,0.9 27.1,0
  pour cut-out: 16.9,14 16.9,13 16,13 16,14
  pour cut-out: 17,14
  pour cut-out: 12.6,5.5 12.6,3.3 12.175,3.3 12.15,3.325 12.15,5.5
  pour cut-out: 14.1,0 14.1,2.4 14.9,2.4 15,2.4 15,0
  pour cut-out: 33.555,13.7 33.613,0.2 33.75,0.2 33.75,13.7
  pour cut-out: 29.4,7.25 31.132,7.249 31.096,3 30,3 29.4,3
  pour cut-out: 24.2,5.5 24.2,2.1 29.225,2.1 25.825,5.5

## Silkscreen, mask and mechanical layers (free items; w line width, h text height)
Top Overlay:
  lines w0.15: 29.9,0.2 29.9,13.7 ; 31.1,0.2 31.1,13.7
Bottom Overlay:
  circle w0.15: c11.2,1.2 r0.4
  circle w0.15: c9.8,1.2 r0.4
  circle w0.15: c8.4,1.2 r0.4
  circle w0.15: c20.5,3.7 r0.8
  circle w0.15: c18.6,3.7 r0.8
  circle w0.15: c20.5,5.6 r0.8
  circle w0.15: c18.6,5.6 r0.8
  circle w0.15: c20.5,7.5 r0.8
  circle w0.15: c18.6,7.5 r0.8
  circle w0.15: c20.5,9.4 r0.8
  circle w0.15: c18.6,9.4 r0.8
  circle w0.15: c20.5,11.3 r0.8
  circle w0.15: c18.6,11.3 r0.8
  rectangle: 10.5,6.3 11.9,6.5
  rectangle: 7.7,5.4 9.2,6.5
  rectangle: 21.4,6.2 21.9,8.8
  region: 30.4,3.7 29.1,3.7 29.1,3.1 30.4,3.1
  region: 30.4,0.8 29.1,0.8 29.1,0.3 30.4,0.3
  rectangle: 29.1,6.9 30.4,7.8
  rectangle: 29.1,9.9 30.4,10.9
  rectangle: 29.1,13 30.4,13.7
  lines w0.15: 7.7,1.9 11.9,1.9 ; 9.1,0.5 9.1,6.5 ; 10.5,0.5 10.5,6.5 ; 7.7,0.5 7.7,2.4 7.7,6.5 11.9,6.5 11.9,0.5 7.7,0.5 ; 17.5,2.6 21.9,2.6 21.9,12.4 17.5,12.4 17.5,2.6 ; 29.1,0.3 30.4,0.3 30.4,13.7 29.1,13.7 29.1,0.3 ; 31.3,1.7 31.3,6.5 33,6.5 33,1.7 31.3,1.7 ; 31.3,8.7 33,8.7 33,12.3 31.3,12.3 31.3,8.7
  text "RX" at 30.3,13 h2.4 r90
  text "RX" at 15.2,12 h2.4 r180
  text "GND" at 22.2,12 h2.4 r180
  text "1" at 18.3,11.8 h2.4 r180
  text "2" at 20.1,11.8 h2.4 r180
  text "5V" at 32.7,10.9 h2.4 r90
  text "ST-Link" at 2.5,10.4 h2.9 r90
  text "TX" at 15.2,10 h2.4 r180
  text "+5V" at 22.2,10 h2.4 r180
  text "3" at 18.2,9.9 h2.4 r180
  text "4" at 20.05,9.9 h2.4 r180
  text "TX" at 30.3,9.8 h2.4 r90
  text "V2.1" at 4.6,8.5 h2.6 r90
  text "RST" at 14.3,8 h2.4 r180
  text "5" at 18.2,8 h2.4 r180
  text "6" at 20.1,8 h2.4 r180
  text "SWDIO" at 22.2,8 h2.4 r180
  text "CON" at 30.3,6.8 h2.4 r90
  text "JTMS" at 10.4,6.4 h2.4 r90
  text "3.3V" at 32.7,6.3 h2.4 r90
  text "JTCK" at 11.8,6.2 h2.4 r90
  text "7" at 18.25,6.1 h2.4 r180
  text "8" at 20.1,6.1 h2.4 r180
  text "SWO" at 13.9,6 h2.4 r180
  text "SWDCLK" at 22.2,6 h2.4 r180
  text "GND" at 9,5.3 h2.4 r90
  text "9" at 18.2,4.2 h2.4 r180
  text "10" at 19.85,4.1 h2 r180
  text "+3.3V" at 12.9,4 h2.4 r180
  text "GND" at 22.2,4 h2.4 r180
  text "ON" at 30.3,3 h2.4 r90
Board:
  the board outline again, w0.1
Dimensions:
  lines w0.1: 0.1,7 45.1,7 ; 0,1.5 ccw(c1.5,1.5) 1.5,0 37,0 37,14 1.5,14 ccw(c1.5,12.5) 0,12.5 0,1.5
Sheet (Mech22):
  lines w0.1: 0,-30.867 5.507,-30.867 17.945,-30.867 29.45,-30.867 38.155,-30.867 45.795,-30.867 52.102,-30.867 ; 0,-29.267 5.507,-29.267 17.945,-29.267 29.45,-29.267 38.155,-29.267 45.795,-29.267 52.102,-29.267 ; 0,-27.667 5.507,-27.667 17.945,-27.667 29.45,-27.667 38.155,-27.667 45.795,-27.667 52.102,-27.667 ; 0,-26.067 5.507,-26.067 17.945,-26.067 29.45,-26.067 38.155,-26.067 45.795,-26.067 52.102,-26.067 ; 0,-24.467 5.507,-24.467 17.945,-24.467 29.45,-24.467 38.155,-24.467 45.795,-24.467 52.102,-24.467 ; 0,-22.867 5.507,-22.867 17.945,-22.867 29.45,-22.867 38.155,-22.867 45.795,-22.867 52.102,-22.867 ; 0,-21.267 5.507,-21.267 17.945,-21.267 29.45,-21.267 38.155,-21.267 45.795,-21.267 52.102,-21.267 ; 0,-19.667 5.507,-19.667 17.945,-19.667 29.45,-19.667 38.155,-19.667 45.795,-19.667 52.102,-19.667 ; 0,-18.067 5.507,-18.067 17.945,-18.067 29.45,-18.067 38.155,-18.067 45.795,-18.067 52.102,-18.067 ; 0,-16.467 5.507,-16.467 17.945,-16.467 29.45,-16.467 38.155,-16.467 45.795,-16.467 52.102,-16.467 ; 0,-14.867 52.102,-14.867 ; 5.507,-13.267 5.507,-32.467 ; 17.945,-13.267 17.945,-32.467 ; 29.45,-13.267 29.45,-32.467 ; 38.155,-13.267 38.155,-32.467 ; 45.795,-13.267 45.795,-32.467 ; 5.507,-32.467 0,-32.467 0,-13.267 52.102,-13.267 52.102,-32.467 45.795,-32.467 ; 5.507,-32.467 17.945,-32.467 ; 17.945,-32.467 29.45,-32.467 ; 29.45,-32.467 38.155,-32.467 ; 38.155,-32.467 45.795,-32.467
  text "'.BoardName'" at 0.5,-5.5 h3
  text "Revision:" at 0.5,-7.5 h2
  text "'.BoardRevision'" at 6.5,-7.5 h2
  text "Layer" at 0.954,-14.467 h0.8
  text "Name" at 6.461,-14.467 h0.8
  text "Material" at 18.899,-14.467 h0.8
  text "Thickness" at 30.404,-14.467 h0.8
  text "Constant" at 39.11,-14.467 h0.8
  text "Gerber" at 46.749,-14.467 h0.8
  text "Top Overlay" at 6.461,-16.067 h0.8
  text "GTO" at 46.749,-16.067 h0.8
  text "Top Solder" at 6.461,-17.667 h0.8
  text "Solder Resist" at 18.899,-17.667 h0.8
  text "0,010mm" at 30.404,-17.667 h0.8
  text "3,5" at 39.11,-17.667 h0.8
  text "GTS" at 46.749,-17.667 h0.8
  text "1" at 0.954,-19.267 h0.8
  text "Top Layer" at 6.461,-19.267 h0.8
  text "Copper" at 18.899,-19.267 h0.8
  text "0,036mm" at 30.404,-19.267 h0.8
  text "GTL" at 46.749,-19.267 h0.8
  text "Dielectric 2" at 6.461,-20.867 h0.8
  text "PP-006" at 18.899,-20.867 h0.8
  text "0,210mm" at 30.404,-20.867 h0.8
  text "4,4" at 39.11,-20.867 h0.8
  text "2" at 0.954,-22.467 h0.8
  text "GND" at 6.461,-22.467 h0.8
  text "Copper" at 18.899,-22.467 h0.8
  text "0,015mm" at 30.404,-22.467 h0.8
  text "G1" at 46.749,-22.467 h0.8
  text "Dielectric 1" at 6.461,-24.067 h0.8
  text "FR-4" at 18.899,-24.067 h0.8
  text "1,065mm" at 30.404,-24.067 h0.8
  text "4,6" at 39.11,-24.067 h0.8
  text "3" at 0.954,-25.667 h0.8
  text "Layer 2" at 6.461,-25.667 h0.8
  text "Copper" at 18.899,-25.667 h0.8
  text "0,015mm" at 30.404,-25.667 h0.8
  text "G2" at 46.749,-25.667 h0.8
  text "Dielectric 3" at 6.461,-27.267 h0.8
  text "PP-006" at 18.899,-27.267 h0.8
  text "0,210mm" at 30.404,-27.267 h0.8
  text "4,4" at 39.11,-27.267 h0.8
  text "4" at 0.954,-28.867 h0.8
  text "Bottom Layer" at 6.461,-28.867 h0.8
  text "Copper" at 18.899,-28.867 h0.8
  text "0,036mm" at 30.404,-28.867 h0.8
  text "GBL" at 46.749,-28.867 h0.8
  text "Bottom Solder" at 6.461,-30.467 h0.8
  text "Solder Resist" at 18.899,-30.467 h0.8
  text "0,010mm" at 30.404,-30.467 h0.8
  text "3,5" at 39.11,-30.467 h0.8
  text "GBS" at 46.749,-30.467 h0.8
  text "Bottom Overlay" at 6.461,-32.067 h0.8
  text "GBO" at 46.749,-32.067 h0.8
  text "Total board thickness:" at 0.954,-33.667 h0.8
  text "1,607mm" at 30.404,-33.667 h0.8

## Dimensions
37,0 to 37,14 on Mechanical 16
0,1.5 to 37,0 on Mechanical 16